# Altium PCB Ultrasound.PcbDoc
Units mm, origin at the board's own origin, x right, y up, seen from the top; angles counter-clockwise.
Board outline 152.4 x 101.6 mm, 2 copper layers (Top Layer, Bottom Layer); 8 components, 5 nets, 19 pads, 4 vias.
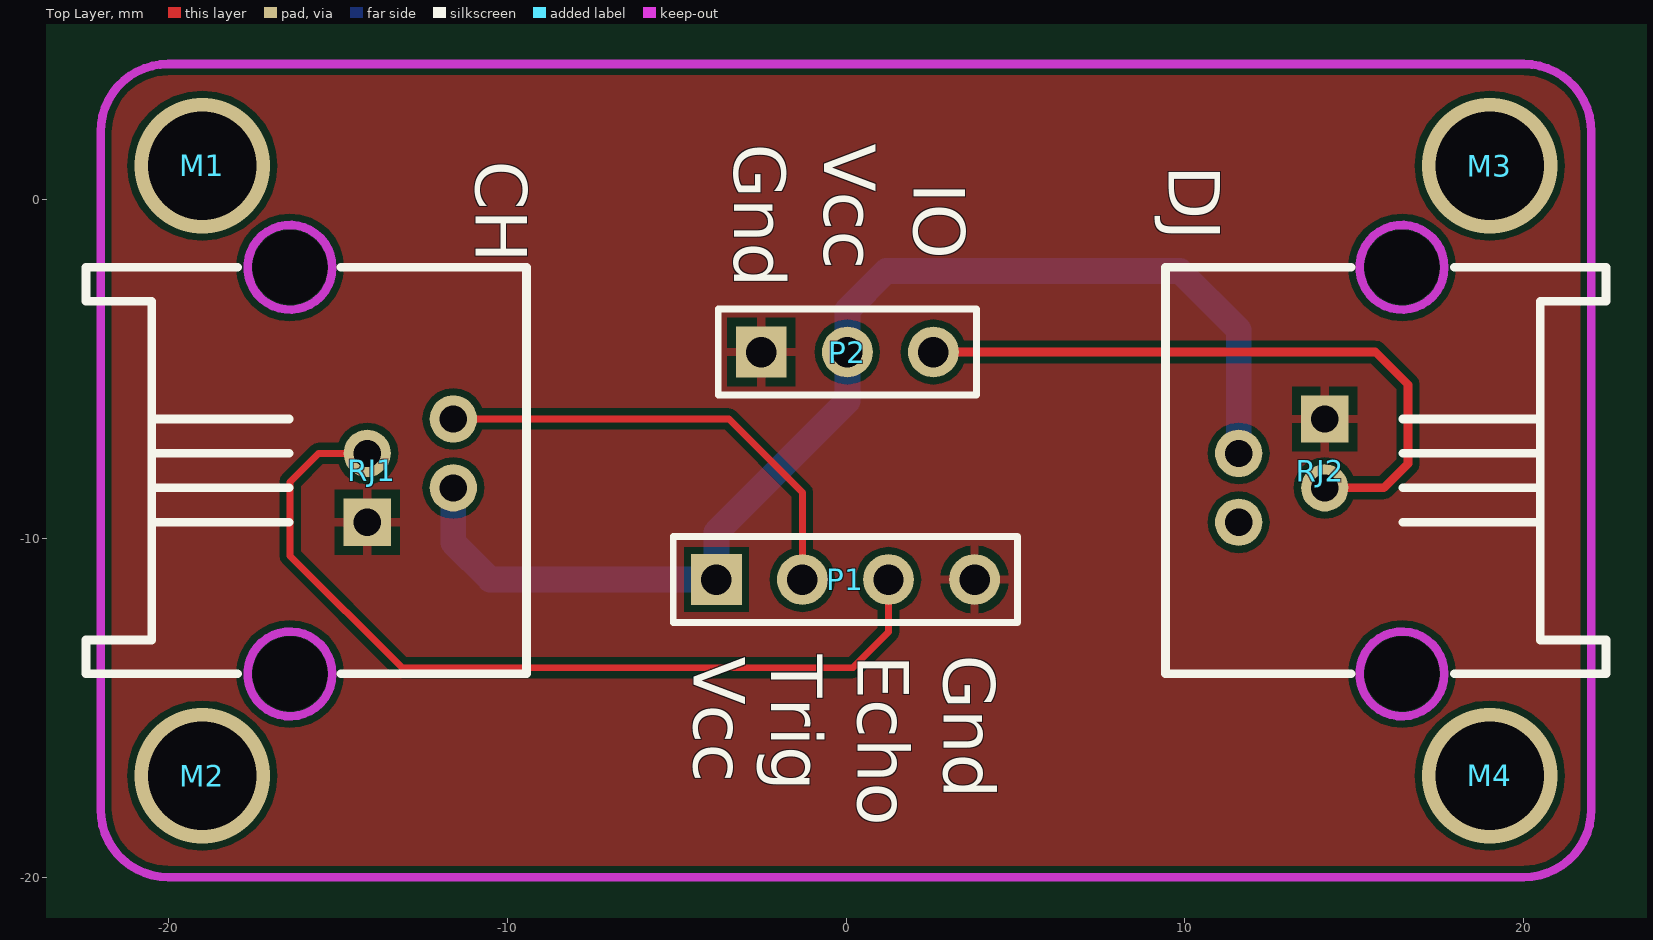
[diagram p0: Top Layer view]
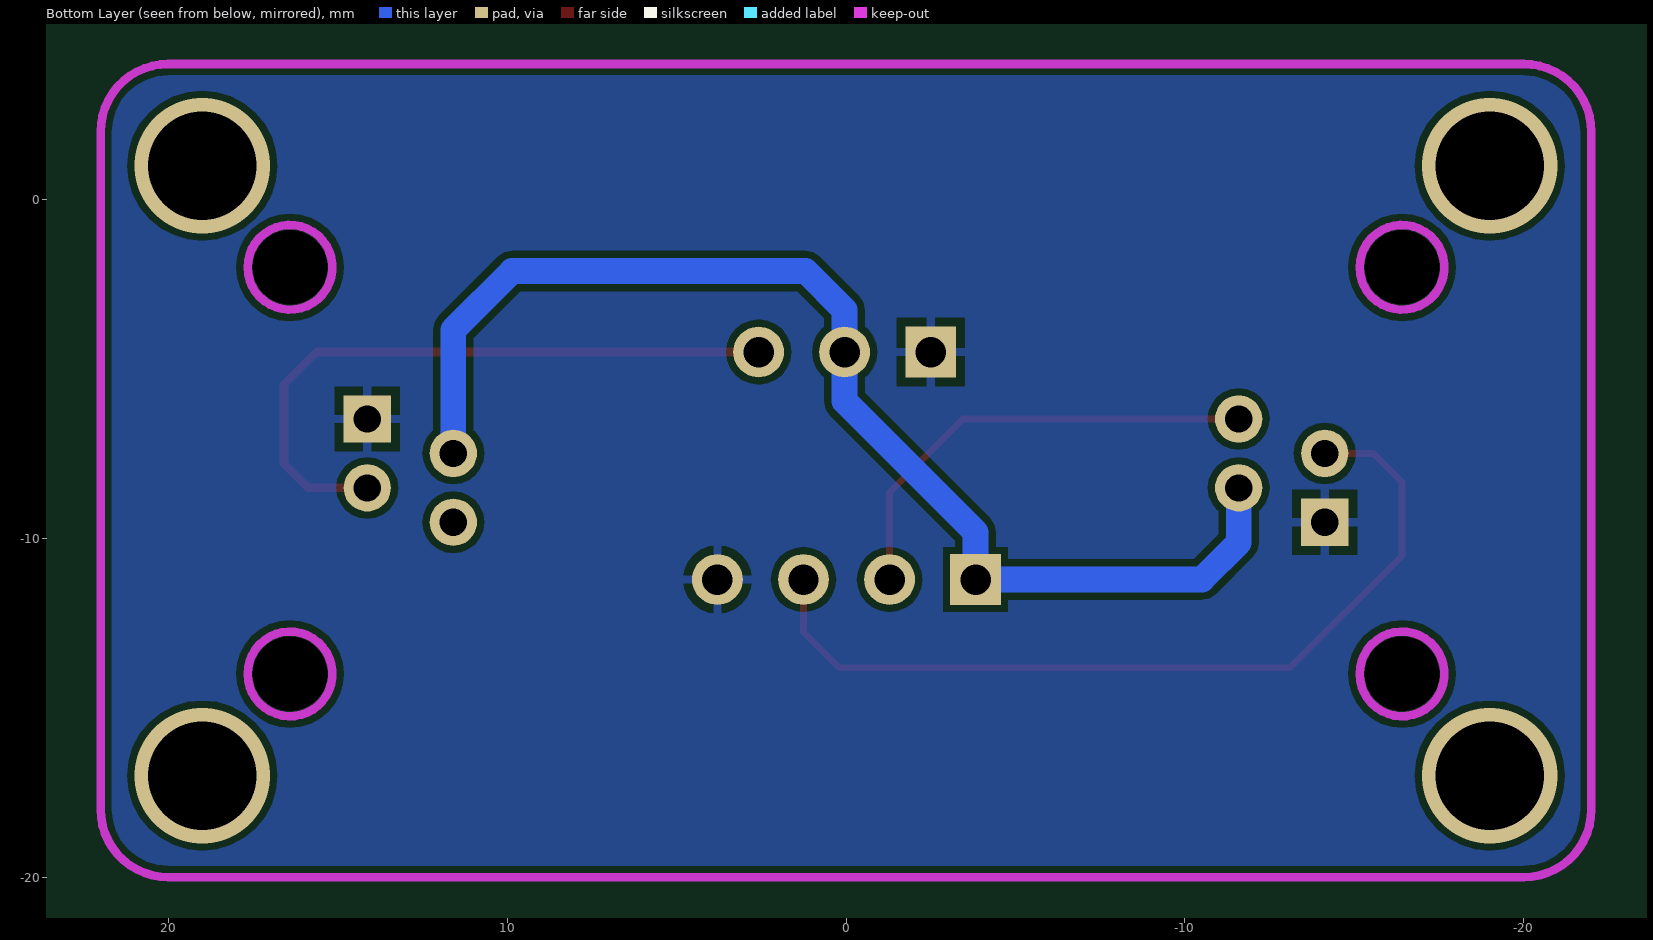
[diagram p1: Bottom Layer view, seen from below]

## Layer stack, top to bottom
Top Solder: solder mask 0.0102, Solder Resist, Dk 3.5
Top Layer: signal copper 0.0356
Dielectric 1: dielectric 0.32, FR-4, Dk 4.8
Bottom Layer: signal copper 0.0356
Bottom Solder: solder mask 0.0102, Solder Resist, Dk 3.5

## Board outline
-97.79,-43.307 54.61,-43.307 54.61,58.293 -97.79,58.293

## Design rules (kind name [scope] priority, off if disabled: settings)
Clearance [All] p1: gap=0.203
ComponentClearance [All] p1 off: gap=0.254 collisioncheckmode=3 verticalgap=0.254 showdistances=FALSE
PolygonConnect [All] p1: connectstyle=Relief reliefconductorwidth=0.254 reliefentries=4 polygonreliefangle="90 Angle" airgapwidth=0.254
RoutingVias [All] p1: holewidth=0.711 width=1.27 viastyle="Through Hole" minholewidth=0.711 minwidth=1.27 maxholewidth=0.711 maxwidth=1.27
SolderMaskExpansion [All] p1: expansion=0.102
Width [All] p1: maxlimit=2.54 minlimit=0.203 preferedwidth=0.203
28 further rules are at their usual default settings.

## Components (designator, comment, footprint, x,y, rotation, side; value= is the part's Value field where it differs from the comment)
M1 "M3" M3 -19,1 r0 top
M2 "M3" M3 -19,-17 r0 top
M3 "M3" M3 19,1 r0 top
M4 "M3" M3 19,-17 r0 top
P1 "Header 4" HDR1X4 -3.826,-11.214 r0 top
P2 "Header 3" HDR1X3 -2.5,-4.5 r0 top
RJ1 "RJ11" RJ11 -14,-8 r90 top
RJ2 "RJ11" RJ11 14,-8 r270 top

## Footprints (in the part's own frame and the unit in brackets; to place one, negate y for a bottom-side part, rotate by r counter-clockwise, add the part's x,y. Pads: shape width x height; smd on the part's side, far side on the other; paste and mask are expansions set on the pad)
HDR1X3 [mm] "Connector; Header; 3 Position"
  rect 1.5x1.5 hole 0.9: 1(0,0)
  round 1.5 hole 0.9: 2(2.54,0) 3(5.08,0)
  silkscreen extent -1.27,-1.27 6.35,1.27
HDR1X4 [mm] "Connector; Header; 4 Position"
  rect 1.5x1.5 hole 0.9: 1(0,0)
  round 1.5 hole 0.9: 2(2.54,0) 3(5.08,0) 4(7.62,0)
  silkscreen extent -1.27,-1.27 8.89,1.27
M3 [mm]
RJ11 [mm]
  round 2.1 hole 2.2 unplated: 0(-6,2.41) 0(6,2.41)
  rect 1.397x1.397 hole 0.8: 1(-1.524,0.13)
  round 1.397 hole 0.8: 2(-0.508,-2.41) 3(0.508,0.13) 4(1.524,-2.41)
  Keep-Out Layer circle w0.254: c-6,2.41 r1.25
  Keep-Out Layer circle w0.254: c6,2.41 r1.25
  silkscreen extent -6,-4.57 6,8.43

## Part data
P1: "Header, 4-Pin"
P2: "Header, 3-Pin"

## Via types
v1: diameter 4, hole 3.2, Top Layer to Bottom Layer, 4 vias

## Nets (pads, with @x,y where several pads share a name; then routed paths per layer and width w, separated by ;. In a path a pad name is that pad's centre, name@x,y a point inside that pad or via, vN(x,y) a via of type N, cw(c..) or ccw(c..) an arc to the next point about the centre after c; other vN are vias at no path point)
ECHO: P1.3 RJ1.3 | length 25.8
  Top Layer w0.203: RJ1.3 -15.569,-7.492 -16.408,-8.331 -16.408,-10.516 -13.106,-13.818 0.203,-13.818 1.254,-12.766 P1.3
GND: P1.4 P2.1 RJ1.1 RJ2.1
IO: P2.3 RJ2.3 | length 19.5
  Top Layer w0.254: P2.3 15.625,-4.5 16.586,-5.461 16.586,-7.798 15.876,-8.508 RJ2.3
TRIG: P1.2 RJ1.4 | length 13.8
  Top Layer w0.203: RJ1.4 -3.455,-6.476 -1.286,-8.646 P1.2
VCC: P1.1 P2.2 RJ1.2 RJ2.2 | length 35.8
  Bottom Layer w0.762: RJ1.2 -11.59,-10.127 -10.503,-11.214 P1.1 -3.826,-9.82 0.04,-5.954 P2.2 0.04,-3.262 1.194,-2.108 9.855,-2.108 11.59,-3.843 RJ2.2
pads on no net: RJ1.0 RJ2.0 RJ2.4
copper on no net:
  other v1: -19,-17 19,-17 -19,1 19,1

## Polygon pours and split planes (outlines as drawn)
GND on Top Layer "Top Layer-No Net" (solid, remove dead copper, pour order 2): -23.368,5.207 -23.241,5.08 23.368,5.08 23.368,-20.701 23.241,-20.828 -22.606,-20.828
GND on Bottom Layer "Top Layer-No Net" (solid, remove dead copper, pour order 4): -23.241,5.334 23.241,5.334 24.257,4.318 24.257,-20.955 -23.495,-20.955 -23.622,-20.828

## Keep-outs
Keep-Out Layer:
  lines w0.254: -22,-18 ccw(c-20,-18) -20,-20 20,-20 ccw(c20,-18) 22,-18 22,2 ccw(c20,2) 20,4 -20,4 ccw(c-20,2) -22,2 -22,-18

## Silkscreen, mask and mechanical layers (free items; w line width, h text height)
Top Overlay:
  text "Gnd" at -3.302,1.651 h1.52 r270
  text "Vcc" at -0.635,1.651 h1.52 r270
  text "CH" at -10.922,1.143 h1.52 r270
  text "DJ" at 9.525,1.016 h1.52 r270
  text "IO" at 2,0.5 h1.52 r270
  text "Trig" at -2.2,-13.44 h1.52 r270
  text "Echo" at 0.34,-13.44 h1.52 r270
  text "Gnd" at 2.88,-13.44 h1.52 r270
  text "Vcc" at -4.5,-13.5 h1.52 r270

## Text inside footprints (layer, text, board x,y; h text height)
RJ1: Mechanical 1 "1" at -16.43,-9.778 h1 r270; Mechanical 1 "2" at -10.842,-8.762 h1 r270; Mechanical 1 "3" at -16.43,-7.746 h1 r270; Mechanical 1 "4" at -10.842,-6.73 h1 r270; Mechanical 1 "1" at -21.002,-10.032 h1 r270; Mechanical 1 "4" at -21.002,-6.476 h1 r270
RJ2: Mechanical 1 "1" at 16.43,-6.222 h1 r90; Mechanical 1 "2" at 10.842,-7.238 h1 r90; Mechanical 1 "3" at 16.43,-8.254 h1 r90; Mechanical 1 "4" at 10.842,-9.27 h1 r90; Mechanical 1 "1" at 21.002,-5.968 h1 r90; Mechanical 1 "4" at 21.002,-9.524 h1 r90